# Altium PCB ZYNQ-HS-DEV-PCB.PcbDoc (part 9 of 13)
Units mm, origin at the board's own origin, x right, y up, seen from the top; angles counter-clockwise.
Board outline 125.73 x 111.93 mm, 10 copper layers (S1 (SIG), S2 (GND), S3 (SIG), S4 (GND), S5 (PWR), S6 (SIG), S7 (GND), S8 (SIG), S9 (GND), S10 (SIG)), stack 1.597 mm thick; 545 components, 400 nets, 2449 pads, 1577 vias.
Unrouted connection lines stored in the file: 309.
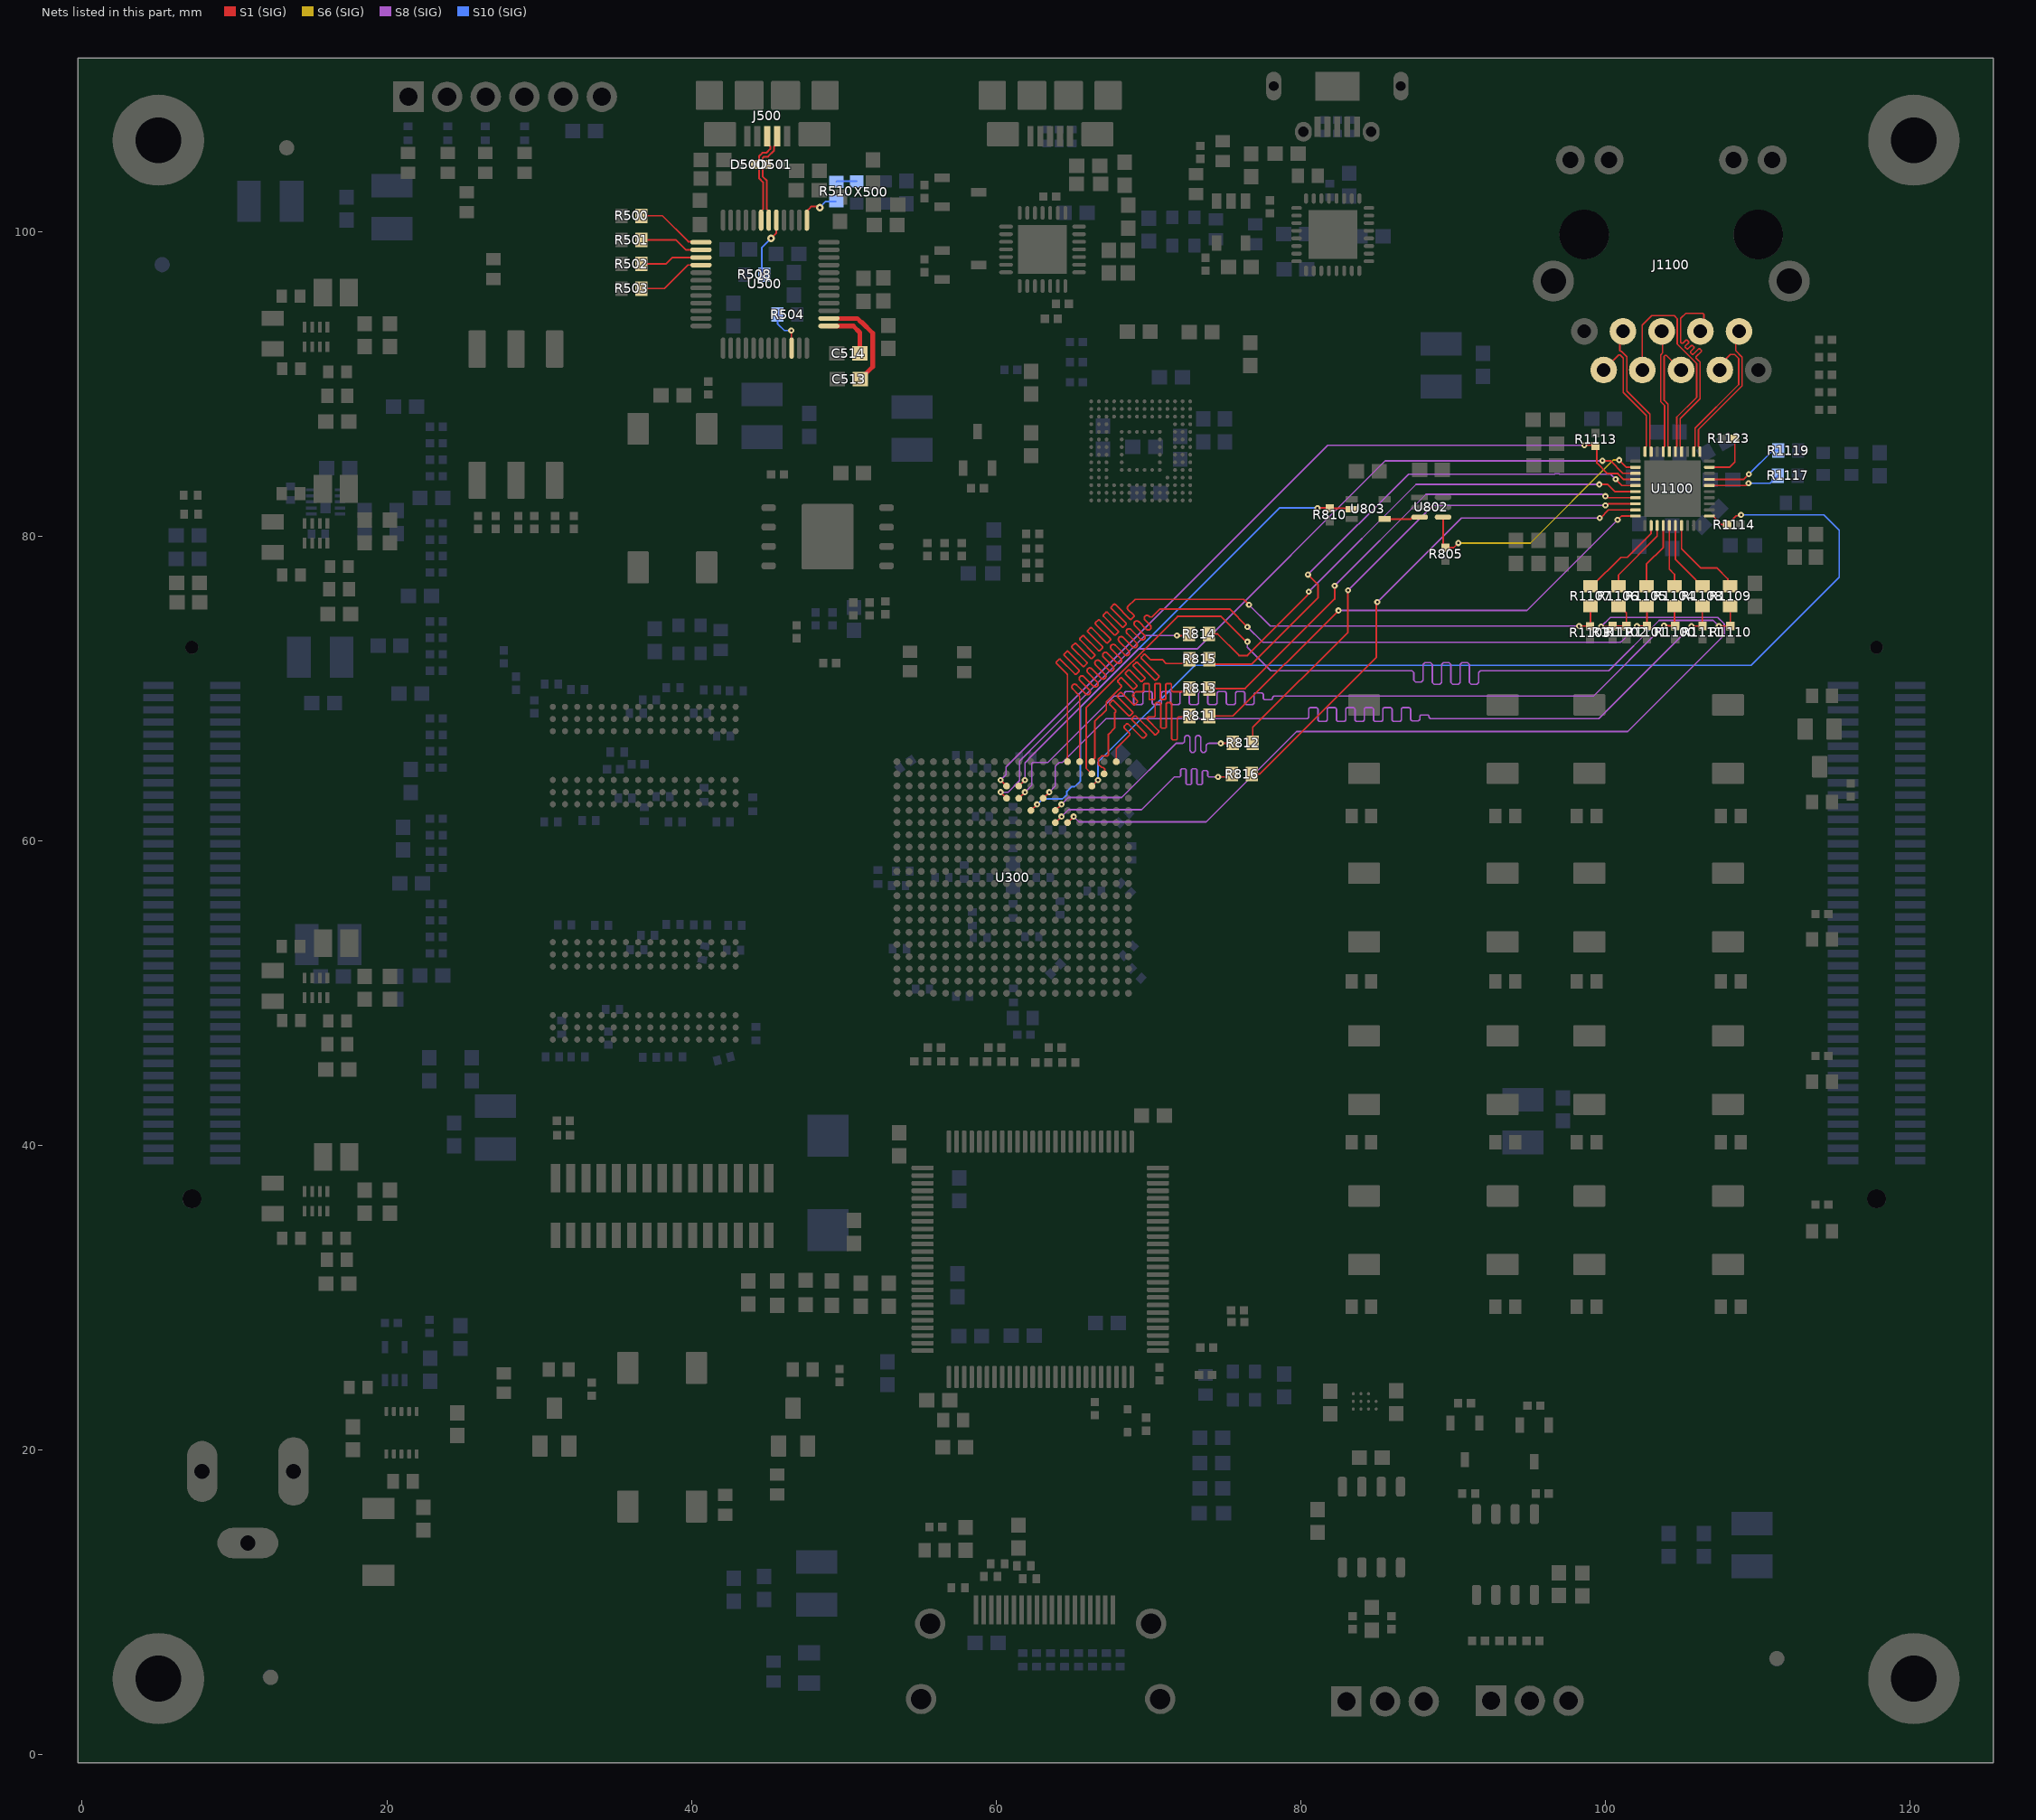
[diagram p16: the nets of this part, all layers, seen from the top]

## Via types
v1: diameter 0.4, hole 0.15, S1 (SIG) to S10 (SIG), tented both sides, 892 vias
v2: diameter 0.5, hole 0.2, S1 (SIG) to S10 (SIG), tented both sides, 231 vias
v3: diameter 0.6, hole 0.3, S1 (SIG) to S10 (SIG), tented both sides, 188 vias
v4: diameter 1, hole 0.5, S1 (SIG) to S10 (SIG), tented both sides, 158 vias
v5: diameter 0.5, hole 0.25, S1 (SIG) to S10 (SIG), tented both sides, 108 vias

## Nets (pads, with @x,y where several pads share a name; then routed paths per layer and width w, separated by ;. In a path a pad name is that pad's centre, name@x,y a point inside that pad or via, vN(x,y) a via of type N, cw(c..) or ccw(c..) an arc to the next point about the centre after c; other vN are vias at no path point) (continued)
ETH_MDC: U300.C11 U1100.13 | length 50.3
  S1 (SIG) w0.11: U300.C11@61.488,63.595 v1(61.888,63.995) ; v1(99.8,84.95) 100.328,84.95 101.153,84.125 U1100.13@101.975,84.125
  S8 (SIG) w0.1: v1(61.888,63.995) 61.888,65.108 62.138,65.358 62.138,65.388 69.35,72.6 73.205,72.6 85.555,84.95 v1(99.8,84.95)
ETH_MDI0_N: J1100.3 U1100.2 | length 9.3
  S1 (SIG) w0.1: U1100.2@105.8,85.55 105.8,85.805 105.887,85.892 105.887,87.093 108.753,89.959 108.753,91.66 108.479,91.933 108.193,91.933 107.505,91.245 J1100.3@107.505,90.91
ETH_MDI0_P: J1100.2 U1100.1 | length 9.4
  S1 (SIG) w0.1: U1100.1@106.2,85.55 106.2,85.805 106.114,85.892 106.114,86.999 108.98,89.865 108.98,91.754 108.55,92.183 108.55,93.225 J1100.2@108.775,93.45
ETH_MDI1_N: J1100.7 U1100.5 | length 15.4
  S1 (SIG) w0.1: J1100.7@102.425,90.91 102.425,93.85 103.05,94.475 104.525,94.475 104.72,94.28 104.72,92.605 105.99,91.335 105.99,89.122 104.687,87.818 104.687,85.892 104.6,85.805 U1100.5@104.6,85.55
ETH_MDI1_P: J1100.4 U1100.4 | length 15.2
  S1 (SIG) w0.1: U1100.4@105,85.55 105,85.805 104.914,85.892 104.914,87.724 106.217,89.028 106.217,91.429 106.165,91.48 106.13,91.516 105.953,91.692 105.953,91.775 106.305,92.127 106.305,92.197 106.199,92.303 106.128,92.303 105.77,91.946 105.7,91.946 105.594,92.052 105.594,92.123 105.818,92.347 105.818,92.418 105.712,92.524 105.641,92.524 105.417,92.299 105.346,92.299 105.24,92.405 105.24,92.476 105.464,92.7 105.464,92.771 105.358,92.877 105.288,92.877 105.088,92.678 105.006,92.678 104.947,92.737 104.947,93.284 104.947,94.297 105.285,94.635 106.407,94.635 106.465,94.576 106.465,93.68 J1100.4@106.235,93.45
ETH_MDI2_N: J1100.6 U1100.7 | length 8.1
  S1 (SIG) w0.1: J1100.6@103.695,93.45 103.759,93.386 103.759,92.033 103.634,91.908 103.634,88.827 103.887,88.575 103.887,85.892 103.8,85.805 U1100.7@103.8,85.55
ETH_MDI2_P: J1100.5 U1100.6 | length 7.9
  S1 (SIG) w0.1: U1100.6@104.2,85.55 104.2,85.805 104.114,85.892 104.114,88.669 103.861,88.921 103.861,91.814 103.92,91.872 104.003,91.872 J1100.5@104.965,90.91
ETH_MDI3_N: J1100.9 U1100.10 | length 8.6
  S1 (SIG) w0.1: J1100.9@99.885,90.91 100.878,91.903 100.961,91.903 101.173,91.69 101.173,89.443 102.687,87.93 102.687,85.892 102.6,85.805 U1100.10@102.6,85.55
ETH_MDI3_P: J1100.8 U1100.9 | length 8.9
  S1 (SIG) w0.1: J1100.8@101.155,93.45 100.954,93.249 100.954,92.188 101.012,92.13 101.055,92.13 101.4,91.784 101.4,89.537 102.914,88.024 102.914,85.892 103,85.805 U1100.9@103,85.55
ETH_MDIO: R1113.1 U300.C10 U1100.14 | length 53.3
  S1 (SIG) w0.11: v1(60.288,63.995) U300.C10@60.688,63.595 ; v1(98.625,85.975) 99.13,85.975 99.18,85.925 R1113.1@99.18,85.805 ; R1113.1@99.35,85.925 99.205,85.78 99.37,85.78 99.445,85.705 99.445,84.803 100.143,84.105 100.822,84.105 101.202,83.725 U1100.14@101.975,83.725
  S8 (SIG) w0.1: v1(60.288,63.995) 60.644,64.351 60.644,64.846 81.773,85.975 v1(98.625,85.975)
ETH_NINT: R1114.1 U300.C17 U1100.31 | length 68
  S1 (SIG) w0.11: U300.C17@66.288,63.595 v1(66.688,63.995) ; U1100.31@106.825,81.325 107.072,81.325 107.624,80.773 107.977,80.773 R1114.1@108,80.75 108.595,81.345 108.845,81.345 v1(108.9,81.4)
  S10 (SIG) w0.11: v1(66.688,63.995) 66.688,65.175 73.038,71.525 109.575,71.525 115.35,77.3 115.35,80.4 114.346,81.404 114.342,81.4 v1(108.9,81.4)
ETH_PHY_NRST: R805.1 U802.4 U1100.12 | length 17.1
  S1 (SIG) w0.11: U802.4@89.34,81.251 89.34,79.41 R805.1@89.5,79.25 90.05,79.25 v1(90.35,79.55) ; v1(100.9,85) 101.375,84.525 U1100.12@101.975,84.525
  S6 (SIG) w0.1: v1(90.35,79.55) 95.075,79.55 100.525,85 v1(100.9,85)
ETH_PHY_RX_CLK: R1109.1 U1100.27 | length 6
  S1 (SIG) w0.11: U1100.27@105,80.7 105,79.164 106.241,77.924 107.315,77.924 108.038,77.201 108.038,76.862 R1109.1@108.2,76.7
ETH_PHY_RX_CTL: R1108.1 U1100.26 | length 4.8
  S1 (SIG) w0.11: U1100.26@104.6,80.7 104.6,78.465 105.945,77.12 105.945,77.045 106.29,76.7 R1108.1@106.365,76.7
ETH_PHY_RXD0: R1104.1 U1100.25 | length 4.1
  S1 (SIG) w0.11: U1100.25@104.2,80.7 104.2,77.83 104.53,77.5 R1104.1@104.53,76.7
ETH_PHY_RXD1: R1105.1 U1100.24 | length 4.5
  S1 (SIG) w0.11: R1105.1@102.695,76.7 102.695,78.173 103.8,79.278 U1100.24@103.8,80.7
ETH_PHY_RXD2: R1106.1 U1100.23 | length 5.1
  S1 (SIG) w0.11: R1106.1@100.86,76.7 100.86,77.455 103.4,79.995 U1100.23@103.4,80.7
ETH_PHY_RXD3: R1107.1 U1100.22 | length 5.9
  S1 (SIG) w0.11: R1107.1@99.025,76.7 99.1,76.7 101.015,78.615 101.43,78.615 103,80.185 U1100.22@103,80.7
ETH_PS_NRST: R810.2 U300.E12 U803.2 | length 32.3
  S1 (SIG) w0.11: U300.E12@62.288,61.995 v1(62.688,62.395) ; v1(81.1,81.85) 81.875,81.85 R810.2@81.9,81.825 83.301,81.825 U803.2@83.35,81.776
  S10 (SIG) w0.11: v1(62.688,62.395) 63.043,62.75 64.345,62.75 64.643,63.048 64.643,63.252 64.941,63.55 65.145,63.55 65.533,63.938 65.533,68.783 78.6,81.85 v1(81.1,81.85)
ETH_PS_SCTRO: U802.3 U803.4 | length 2.4
  S1 (SIG) w0.11: U803.4@85.5,81.126 87.235,81.126 87.36,81.251 U802.3@87.8,81.251
ETH_PS_TX_CLK: R811.2 U300.A19 | length 20.6
  S1 (SIG) w0.11: U300.A19@67.888,65.195 67.888,66.063 68.738,66.912 68.776,66.951 68.776,67.054 68.406,67.425 68.406,67.527 68.561,67.682 68.664,67.682 69.594,66.751 69.697,66.751 69.851,66.906 69.851,67.009 68.921,67.939 68.921,68.042 69.075,68.197 69.178,68.197 70.397,66.978 70.5,66.978 70.654,67.133 70.654,67.235 69.926,67.964 69.926,68.067 69.999,68.139 70.312,68.139 70.367,68.139 70.44,68.212 70.44,69.01 70.513,69.083 70.731,69.083 70.804,69.01 70.804,67.47 70.877,67.397 71.095,67.397 71.168,67.47 71.168,69.01 71.241,69.083 71.459,69.083 71.532,69.01 71.532,66.699 71.605,66.626 71.823,66.626 71.896,66.699 71.896,68.067 71.969,68.139 72.3,68.139 72.639,68.139 R811.2@72.7,68.2
ETH_PS_TX_CTL: R816.2 U300.F14 | length 17.3
  S1 (SIG) w0.11: U300.F14@63.888,61.195 v1(64.288,61.595) ; v1(74.575,64.195) 75.295,64.195 R816.2@75.475,64.375
  S8 (SIG) w0.1: v1(64.288,61.595) 64.738,62.045 69.545,62.045 71.7,64.2 72,64.2 72.05,64.2 72.121,64.271 72.121,64.65 72.192,64.721 72.404,64.721 72.475,64.65 72.475,63.769 72.546,63.699 72.758,63.699 72.829,63.769 72.829,64.65 72.9,64.721 73.112,64.721 73.183,64.65 73.183,63.769 73.254,63.699 73.466,63.699 73.537,63.769 73.537,64.533 73.608,64.604 73.82,64.604 73.891,64.533 73.891,64.271 73.962,64.2 74.082,64.2 74.57,64.2 v1(74.575,64.195)
ETH_PS_TXD0: R812.2 U300.E14 | length 17.2
  S1 (SIG) w0.11: U300.E14@63.888,61.995 v1(64.288,62.395) ; v1(74.75,66.4) 75.525,66.4 R812.2@75.55,66.425
  S8 (SIG) w0.1: v1(64.288,62.395) 64.738,62.845 68.245,62.845 71.8,66.4 72.15,66.4 72.2,66.4 ccw(c72.2,66.577) 72.377,66.577 72.377,66.742 cw(c72.554,66.742) 72.731,66.742 72.731,65.975 ccw(c72.908,65.975) 73.085,65.975 73.085,66.742 cw(c73.262,66.742) 73.439,66.742 73.439,65.975 ccw(c73.616,65.975) 73.793,65.975 73.793,66.223 cw(c73.97,66.223) 73.97,66.4 74.35,66.4 v1(74.75,66.4)
ETH_PS_TXD1: R813.2 U300.B18 | length 20.5
  S1 (SIG) w0.11: U300.B18@67.088,64.395 67.131,64.438 67.131,64.72 67.036,64.815 66.93,64.815 66.708,65.037 66.708,65.352 66.93,65.575 67.311,65.575 67.375,65.639 67.375,66.7 67.375,66.99 67.78,67.395 67.78,68.395 67.819,68.434 ccw(c67.741,68.512) 67.819,68.589 67.467,68.942 cw(c67.518,68.993) 67.467,69.045 67.621,69.199 cw(c67.673,69.148) 67.724,69.199 68.701,68.222 ccw(c68.752,68.274) 68.804,68.222 68.958,68.377 ccw(c68.907,68.428) 68.958,68.48 67.981,69.456 cw(c68.033,69.508) 67.981,69.559 68.136,69.714 cw(c68.187,69.662) 68.239,69.714 69.008,68.945 ccw(c69.059,68.996) 69.111,68.945 69.265,69.099 ccw(c69.214,69.151) 69.265,69.202 69.004,69.463 cw(c69.082,69.541) 69.004,69.619 69.18,69.795 69.352,69.795 69.525,69.795 69.58,69.795 ccw(c69.58,69.905) 69.69,69.905 69.69,70.248 cw(c69.763,70.248) 69.763,70.32 69.981,70.32 cw(c69.981,70.248) 70.054,70.248 70.054,69.343 ccw(c70.127,69.343) 70.127,69.27 70.345,69.27 ccw(c70.345,69.343) 70.418,69.343 70.418,70.248 cw(c70.491,70.248) 70.491,70.32 70.709,70.32 cw(c70.709,70.248) 70.782,70.248 70.782,69.359 ccw(c70.855,69.359) 70.855,69.287 71.073,69.287 ccw(c71.073,69.359) 71.146,69.359 71.146,70.248 cw(c71.219,70.248) 71.219,70.32 71.437,70.32 cw(c71.437,70.248) 71.51,70.248 71.51,69.905 ccw(c71.62,69.905) 71.62,69.795 71.825,69.795 72.495,69.795 R813.2@72.7,70
ETH_PS_TXD2: R814.2 U300.D10 | length 18
  S1 (SIG) w0.11: v1(60.288,63.195) U300.D10@60.688,62.795 ; v1(71.875,73.475) 72.611,73.475 72.675,73.539 R814.2@72.675,73.575
  S8 (SIG) w0.1: v1(60.288,63.195) 60.783,63.195 61.538,63.95 61.538,65.238 63,66.7 69.775,73.475 v1(71.875,73.475)
ETH_PS_TXD3: R815.2 U300.A17 | length 19.7
  S1 (SIG) w0.11: U300.A17@66.288,65.195 66.288,65.239 66.478,65.429 66.478,66.7 66.478,67.832 67.235,68.59 67.235,69.11 68.07,69.945 68.092,69.945 68.156,70.01 68.156,70.031 68.195,70.07 ccw(c68.117,70.148) 68.195,70.226 67.998,70.423 cw(c68.049,70.474) 67.998,70.526 68.152,70.68 cw(c68.204,70.629) 68.255,70.68 68.96,69.975 ccw(c69.012,70.027) 69.063,69.975 69.218,70.13 ccw(c69.166,70.181) 69.218,70.233 68.513,70.938 cw(c68.564,70.989) 68.513,71.041 68.667,71.195 cw(c68.719,71.144) 68.77,71.195 69.489,70.477 ccw(c69.54,70.528) 69.592,70.477 69.746,70.631 ccw(c69.695,70.682) 69.746,70.734 69.028,71.453 cw(c69.079,71.504) 69.028,71.555 69.182,71.71 cw(c69.233,71.658) 69.285,71.71 70.413,70.582 ccw(c70.464,70.633) 70.516,70.582 70.67,70.736 ccw(c70.619,70.788) 70.67,70.839 69.542,71.967 cw(c69.594,72.019) 69.542,72.07 69.697,72.225 cw(c69.748,72.173) 69.8,72.225 70.092,71.932 ccw(c70.17,72.01) 70.17,71.9 70.905,71.9 71.165,71.64 72.415,71.64 R815.2@72.7,71.925
ETH_RSET: R1123.2 U1100.39 | length 3.3
  S1 (SIG) w0.11: U1100.39@106.825,84.525 108.148,84.525 108.5,84.877 R1123.2@108.5,86.4
ETH_RX_CLK: R1109.2 R1110.2 U300.B17 | length 62.7
  S1 (SIG) w0.11: U300.B17@66.288,64.395 65.908,64.775 65.908,68.733 71.91,74.735 74.763,74.735 76.423,73.075 v1(76.5,73.075) ; v1(107.45,74.1) R1110.2@108.2,74.1 R1109.2@108.2,75.4
  S8 (SIG) w0.1: v1(76.5,73.075) 76.5,72.7 78.025,71.175 80.125,71.175 87.301,71.175 87.422,71.053 87.422,70.547 87.544,70.425 87.909,70.425 88.03,70.547 88.03,71.577 88.152,71.699 88.517,71.699 88.638,71.577 88.638,70.4 88.76,70.278 89.125,70.278 89.246,70.4 89.246,71.577 89.368,71.699 89.733,71.699 89.854,71.577 89.854,70.4 89.976,70.278 90.341,70.278 90.462,70.4 90.462,71.577 90.584,71.699 90.949,71.699 91.07,71.577 91.07,70.4 91.192,70.278 91.557,70.278 91.678,70.4 91.678,71.053 91.8,71.175 91.85,71.175 100.225,71.175 103.525,74.475 107.075,74.475 v1(107.45,74.1)
ETH_RX_CTL: R1108.2 R1111.2 U300.D13 | length 59.8
  S1 (SIG) w0.11: U300.D13@63.088,62.795 v1(63.488,63.195) ; v1(105.65,74.1) R1111.2@106.375,74.1 106.365,74.11 R1108.2@106.365,75.4
  S8 (SIG) w0.1: v1(63.488,63.195) 63.888,63.595 63.888,64.89 64.143,65.145 64.345,65.145 67.225,68.025 80.35,68.025 80.4,68.025 ccw(c80.4,68.147) 80.522,68.147 80.522,68.625 cw(c80.643,68.625) 80.643,68.746 81.008,68.746 cw(c81.008,68.625) 81.13,68.625 81.13,67.965 ccw(c81.251,67.965) 81.251,67.844 81.616,67.844 ccw(c81.616,67.965) 81.738,67.965 81.738,68.625 cw(c81.859,68.625) 81.859,68.746 82.224,68.746 cw(c82.224,68.625) 82.346,68.625 82.346,67.965 ccw(c82.467,67.965) 82.467,67.844 82.832,67.844 ccw(c82.832,67.965) 82.954,67.965 82.954,68.625 cw(c83.075,68.625) 83.075,68.746 83.44,68.746 cw(c83.44,68.625) 83.562,68.625 83.562,67.965 ccw(c83.683,67.965) 83.683,67.844 84.048,67.844 ccw(c84.048,67.965) 84.17,67.965 84.17,68.625 cw(c84.291,68.625) 84.291,68.746 84.656,68.746 cw(c84.656,68.625) 84.778,68.625 84.778,67.965 ccw(c84.899,67.965) 84.899,67.844 85.264,67.844 ccw(c85.264,67.965) 85.386,67.965 85.386,68.625 cw(c85.507,68.625) 85.507,68.746 85.872,68.746 cw(c85.872,68.625) 85.994,68.625 85.994,67.965 ccw(c86.115,67.965) 86.115,67.844 86.48,67.844 ccw(c86.48,67.965) 86.602,67.965 86.602,68.625 cw(c86.723,68.625) 86.723,68.746 87.088,68.746 cw(c87.088,68.625) 87.21,68.625 87.21,68.003 ccw(c87.331,68.003) 87.331,67.881 87.696,67.881 ccw(c87.696,68.003) 87.818,68.003 87.818,68.147 cw(c87.939,68.147) 87.939,68.268 88.304,68.268 cw(c88.304,68.147) 88.426,68.147 ccw(c88.547,68.147) 88.547,68.025 90.625,68.025 99.575,68.025 v1(105.65,74.1)
ETH_RXD0: R1100.1 R1104.2 U300.D11 | length 60.9
  S1 (SIG) w0.11: U300.D11@61.488,62.795 v1(61.888,63.195) ; v1(103.85,74.125) 104.55,74.125 R1100.1@104.575,74.1 104.53,74.145 R1104.2@104.53,75.4
  S8 (SIG) w0.1: v1(61.888,63.195) 62.338,63.645 62.338,65.086 62.396,65.145 63.395,65.145 67.754,69.504 68.25,69.504 68.3,69.504 ccw(c68.3,69.625) 68.422,69.625 68.422,69.676 cw(c68.543,69.676) 68.543,69.798 68.908,69.798 cw(c68.908,69.676) 69.03,69.676 69.03,69.072 ccw(c69.151,69.072) 69.151,68.951 69.516,68.951 ccw(c69.516,69.072) 69.638,69.072 69.638,69.676 cw(c69.759,69.676) 69.759,69.798 70.124,69.798 cw(c70.124,69.676) 70.246,69.676 70.246,69.072 ccw(c70.367,69.072) 70.367,68.951 70.732,68.951 ccw(c70.732,69.072) 70.854,69.072 70.854,69.676 cw(c70.975,69.676) 70.975,69.798 71.34,69.798 cw(c71.34,69.676) 71.462,69.676 71.462,69.072 ccw(c71.583,69.072) 71.583,68.951 71.948,68.951 ccw(c71.948,69.072) 72.07,69.072 72.07,69.676 cw(c72.191,69.676) 72.191,69.798 72.556,69.798 cw(c72.556,69.676) 72.678,69.676 72.678,69.072 ccw(c72.799,69.072) 72.799,68.951 73.164,68.951 ccw(c73.164,69.072) 73.286,69.072 73.286,69.676 cw(c73.407,69.676) 73.407,69.798 73.772,69.798 cw(c73.772,69.676) 73.894,69.676 73.894,69.072 ccw(c74.015,69.072) 74.015,68.951 74.38,68.951 ccw(c74.38,69.072) 74.502,69.072 74.502,69.676 cw(c74.623,69.676) 74.623,69.798 74.988,69.798 cw(c74.988,69.676) 75.11,69.676 75.11,69.072 ccw(c75.231,69.072) 75.231,68.951 75.596,68.951 ccw(c75.596,69.072) 75.718,69.072 75.718,69.676 cw(c75.839,69.676) 75.839,69.798 76.204,69.798 cw(c76.204,69.676) 76.326,69.676 76.326,69.072 ccw(c76.447,69.072) 76.447,68.951 76.812,68.951 ccw(c76.812,69.072) 76.934,69.072 76.934,69.586 cw(c77.055,69.586) 77.055,69.708 77.42,69.708 cw(c77.42,69.586) 77.542,69.586 77.542,69.382 ccw(c77.663,69.382) 77.663,69.26 78.028,69.26 ccw(c78.028,69.382) 78.15,69.382 cw(c78.271,69.382) 78.271,69.504 85.15,69.504 99.229,69.504 v1(103.85,74.125)
ETH_RXD1: R1101.1 R1105.2 U300.A16 | length 66.6
  S1 (SIG) w0.11: U300.A16@65.488,65.195 65.488,69.308 65.488,69.385 ccw(c65.177,69.385) 65.397,69.605 65.026,69.975 cw(c65.155,70.104) 65.026,70.233 cw(c65.155,70.104) 65.284,70.233 65.872,69.644 ccw(c66.001,69.773) 66.13,69.644 ccw(c66.001,69.773) 66.13,69.902 65.506,70.525 cw(c65.635,70.654) 65.506,70.783 cw(c65.635,70.654) 65.763,70.783 66.387,70.159 ccw(c66.516,70.288) 66.644,70.159 ccw(c66.516,70.288) 66.644,70.416 66.021,71.04 cw(c66.15,71.169) 66.021,71.297 cw(c66.15,71.169) 66.278,71.297 66.902,70.674 ccw(c67.03,70.802) 67.159,70.674 ccw(c67.03,70.802) 67.159,70.931 66.536,71.555 cw(c66.664,71.683) 66.536,71.812 cw(c66.664,71.683) 66.793,71.812 67.417,71.189 ccw(c67.545,71.317) 67.674,71.189 ccw(c67.545,71.317) 67.674,71.446 67.05,72.069 cw(c67.179,72.198) 67.05,72.327 cw(c67.179,72.198) 67.308,72.327 67.931,71.703 ccw(c68.06,71.832) 68.189,71.703 ccw(c68.06,71.832) 68.189,71.961 67.565,72.584 cw(c67.694,72.713) 67.565,72.842 cw(c67.694,72.713) 67.823,72.842 68.446,72.218 ccw(c68.575,72.347) 68.703,72.218 ccw(c68.575,72.347) 68.703,72.476 68.08,73.099 cw(c68.209,73.228) 68.08,73.356 cw(c68.209,73.228) 68.337,73.356 68.961,72.733 ccw(c69.09,72.862) 69.218,72.733 ccw(c69.09,72.862) 69.218,72.99 68.595,73.614 cw(c68.723,73.743) 68.595,73.871 cw(c68.723,73.743) 68.852,73.871 69.476,73.248 ccw(c69.604,73.376) 69.733,73.248 ccw(c69.604,73.376) 69.733,73.505 69.109,74.129 cw(c69.238,74.257) 69.109,74.386 cw(c69.238,74.257) 69.367,74.386 69.86,73.893 ccw(c69.989,74.022) 70.117,73.893 ccw(c69.989,74.022) 70.117,74.15 69.78,74.487 cw(c69.909,74.616) 69.78,74.745 cw(c69.909,74.616) 70.038,74.745 ccw(c70.166,74.874) 70.295,74.745 70.775,75.225 70.998,75.225 75.325,75.225 v1(76.5,74.05) ; v1(102.075,74.1) R1101.1@102.725,74.1 102.725,75.37 R1105.2@102.695,75.4
  S8 (SIG) w0.1: v1(76.5,74.05) 77.518,73.032 100.941,73.032 100.959,73.05 101.025,73.05 v1(102.075,74.1)
ETH_RXD2: R1102.1 R1106.2 R1112.2 U300.F15 | length 61
  S1 (SIG) w0.11: U300.F15@64.688,61.195 v1(65.088,61.595) ; v1(99.725,74.075) 100.45,74.075 R1112.2@100.475,74.1 R1102.1@101.375,74.1 101.375,74.96 100.935,75.4 R1106.2@100.86,75.4
  S8 (SIG) w0.1: v1(65.088,61.595) 65.438,61.245 70.175,61.245 73.795,61.245 79.725,67.175 101.47,67.175 107.8,73.505 107.8,74.245 107.37,74.675 100.325,74.675 v1(99.725,74.075)
ETH_RXD3: R1103.1 R1107.2 U300.A15 | length 67.5
  S1 (SIG) w0.11: U300.A15@64.688,65.195 64.688,70.8 64.688,70.878 ccw(c64.563,70.878) 64.651,70.965 63.964,71.653 cw(c64.015,71.704) 63.964,71.756 64.118,71.91 cw(c64.17,71.859) 64.221,71.91 65.174,70.957 ccw(c65.226,71.009) 65.277,70.957 65.432,71.112 ccw(c65.38,71.163) 65.432,71.215 64.479,72.168 cw(c64.53,72.219) 64.479,72.271 64.633,72.425 cw(c64.684,72.374) 64.736,72.425 65.689,71.472 ccw(c65.74,71.524) 65.792,71.472 65.946,71.627 ccw(c65.895,71.678) 65.946,71.73 64.993,72.682 cw(c65.045,72.734) 64.993,72.785 65.148,72.94 cw(c65.199,72.888) 65.251,72.94 66.204,71.987 ccw(c66.255,72.038) 66.307,71.987 66.461,72.141 ccw(c66.41,72.193) 66.461,72.244 65.508,73.197 cw(c65.56,73.249) 65.508,73.3 65.663,73.455 cw(c65.714,73.403) 65.765,73.455 66.718,72.502 ccw(c66.77,72.553) 66.821,72.502 66.976,72.656 ccw(c66.924,72.708) 66.976,72.759 66.023,73.712 cw(c66.074,73.764) 66.023,73.815 66.177,73.969 cw(c66.229,73.918) 66.28,73.969 67.233,73.016 ccw(c67.285,73.068) 67.336,73.016 67.491,73.171 ccw(c67.439,73.222) 67.491,73.274 66.538,74.227 cw(c66.589,74.278) 66.538,74.33 66.692,74.484 cw(c66.744,74.433) 66.795,74.484 67.748,73.531 ccw(c67.799,73.583) 67.851,73.531 68.005,73.686 ccw(c67.954,73.737) 68.005,73.789 67.052,74.742 cw(c67.104,74.793) 67.052,74.845 67.207,74.999 cw(c67.258,74.947) 67.31,74.999 68.263,74.046 ccw(c68.314,74.097) 68.366,74.046 68.52,74.2 ccw(c68.469,74.252) 68.52,74.303 67.567,75.256 cw(c67.619,75.308) 67.567,75.359 67.722,75.514 cw(c67.773,75.462) 67.825,75.514 68.778,74.561 ccw(c68.829,74.612) 68.88,74.561 69.035,74.715 ccw(c68.983,74.767) 69.035,74.818 68.642,75.211 cw(c68.72,75.289) 68.642,75.367 69.125,75.85 69.623,75.85 76.25,75.85 v1(76.6,75.5) ; v1(98.275,74.1) 99.025,74.1 R1107.2@99.025,75.4
  S8 (SIG) w0.1: v1(76.6,75.5) 78,74.1 v1(98.275,74.1)
ETH_TX_CLK: R811.1 U1100.20 | length 33.4
  S1 (SIG) w0.11: R811.1@74,68.2 75.55,68.2 v1(82.475,75.125) ; v1@100.816,81.075 101.066,81.325 U1100.20@101.975,81.325
  S8 (SIG) w0.1: v1(82.475,75.125) 94.85,75.125 v1(100.8,81.075)
ETH_TX_CTL: R816.1 U1100.19 | length 34.4
  S1 (SIG) w0.11: R816.1@76.9,64.38 77.305,64.38 84.97,72.045 84.97,75.62 v1(85.025,75.675) ; v1(99.625,81.2) 99.677,81.2 100.202,81.725 U1100.19@101.975,81.725
  S8 (SIG) w0.1: v1(85.025,75.675) 90.55,81.2 v1(99.625,81.2)
ETH_TXD0: R812.1 U1100.18 | length 33.8
  S1 (SIG) w0.11: R812.1@76.85,66.425 76.85,67.45 83.1,73.7 v1(83.1,76.45) ; v1(100,82.025) 100.078,82.025 100.178,82.125 U1100.18@101.975,82.125
  S8 (SIG) w0.1: v1(83.1,76.45) 88.675,82.025 v1(100,82.025)
ETH_TXD1: R813.1 U1100.17 | length 33.9
  S1 (SIG) w0.11: R813.1@74,70 76.348,70 82.225,75.877 v1(82.225,76.75) ; v1(100,82.625) 100.078,82.625 100.178,82.525 U1100.17@101.975,82.525
  S8 (SIG) w0.1: v1(82.225,76.75) 88.225,82.75 99.794,82.75 99.919,82.625 v1(100,82.625)
ETH_TXD2: R814.1 U1100.16 | length 33.5
  S1 (SIG) w0.11: R814.1@73.975,73.575 74.548,73.575 75.953,72.17 76.497,72.17 80.47,76.142 80.47,76.295 v1(80.525,76.35) ; v1(99.6,83.4) 100.15,83.4 100.625,82.925 U1100.16@101.975,82.925
  S8 (SIG) w0.1: v1(80.525,76.35) 87.575,83.4 v1(99.6,83.4)
ETH_TXD3: R815.1 U1100.15 | length 35.4
  S1 (SIG) w0.11: R815.1@74,71.925 74.335,71.59 76.768,71.59 81.14,75.962 81.14,76.81 v1(80.475,77.475) ; v1@100.675,83.743 101.093,83.325 U1100.15@101.975,83.325
  S8 (SIG) w0.1: v1(80.475,77.475) 87.075,84.075 96.655,84.075 96.68,84.1 96.97,84.1 96.995,84.075 100.35,84.075 v1(100.675,83.75)
ETH_XTAL_IN: R1117.1 U1100.36 | length 4.8
  S1 (SIG) w0.11: U1100.36@106.825,83.325 109.25,83.325 v1(109.4,83.475)
  S10 (SIG) w0.11: v1(109.4,83.475) 110.825,83.475 R1117.1@111.325,83.975
ETH_XTAL_OUT: R1119.1 U1100.37 | length 5.3
  S1 (SIG) w0.11: U1100.37@106.825,83.725 109.075,83.725 v1(109.425,84.075)
  S10 (SIG) w0.11: v1(109.425,84.075) 110.975,85.625 R1119.1@111.35,85.625
FTDI_COUT: R510.1 X500.3 | length 1.4
  S10 (SIG) w0.11: R510.1@49.5,103.275 49.525,103.3 X500.3@50.85,103.3
FTDI_D_N: D501.2 J500.2 U500.6 | length 6.5
  S1 (SIG) w0.121: U500.6@45.075,100.75 45.075,101.334 44.949,101.46 44.949,103.337 44.687,103.6 44.687,104.09 44.758,104.161 44.811,104.161 45,104.35 D501.2@45,104.4 45,104.45 44.811,104.639 44.758,104.639 44.687,104.71 44.687,104.849 44.758,104.92 45.02,104.92 45.424,105.324 45.424,105.587 45.625,105.787 J500.2@45.625,106.262
FTDI_D_P: D500.2 J500.3 U500.7 | length 6.5
  S1 (SIG) w0.121: D500.2@44.125,104.4 44.125,104.35 44.314,104.161 44.368,104.161 44.438,104.09 44.438,103.497 44.701,103.235 44.701,101.46 44.575,101.334 U500.7@44.575,100.75 ; D500.2@44.125,104.45 44.314,104.639 44.368,104.639 44.438,104.71 44.438,104.952 44.655,105.168 44.917,105.168 45.176,105.427 45.176,105.587 44.975,105.787 J500.3@44.975,106.262
FTDI_OSCI: R510.2 U500.1 | length 2.8
  S1 (SIG) w0.11: U500.1@47.575,100.75 47.575,101.351 47.749,101.525 47.75,101.525 47.875,101.65 48.35,101.65 v2(48.425,101.575)
  S10 (SIG) w0.11: v2(48.425,101.575) 48.825,101.975 R510.2@49.5,101.975
FTDI_REF: R508.1 U500.5 | length 4
  S1 (SIG) w0.11: v2(45.225,99.55) 45.575,99.9 U500.5@45.575,100.75
  S10 (SIG) w0.11: R508.1@44.775,97.175 44.625,97.325 44.625,98.95 v2(45.225,99.55)
FTDI_RST: R504.2 U500.34 | length 2.8
  S1 (SIG) w0.11: v1(46.55,93.5) 46.563,93.487 46.563,92.362 U500.34@46.575,92.35
  S10 (SIG) w0.11: R504.2@45.65,94.55 45.65,93.95 46.1,93.5 v1(46.55,93.5)
FTDI_TCK: R500.1 U500.13 | length 4.6
  S1 (SIG) w0.11: R500.1@36.7,101.033 38.092,101.033 39.789,99.336 40.589,99.336 U500.13@40.625,99.3
FTDI_TDI: R501.1 U500.14 | length 4.2
  S1 (SIG) w0.11: R501.1@36.7,99.442 38.983,99.442 39.625,98.8 U500.14@40.625,98.8
FTDI_TDO: R502.1 U500.15 | length 4.1
  S1 (SIG) w0.11: R502.1@36.7,97.875 38.322,97.875 38.747,98.3 U500.15@40.625,98.3
FTDI_TMS: R503.1 U500.16 | length 4.6
  S1 (SIG) w0.11: R503.1@36.7,96.258 38.233,96.258 39.775,97.8 U500.16@40.625,97.8
FTDI_VCCA: C514.2 U500.37 | length 3.6
  S1 (SIG) w0.3: U500.37@49.025,93.8 50.625,93.8 51.05,93.375 C514.2@51.05,92
FTDI_VCORE: C513.2 U500.38 | length 6.6
  S1 (SIG) w0.3: U500.38@49.025,94.3 50.884,94.3 51.134,94.05 51.175,94.05 51.9,93.325 51.9,91.125 C513.2@51.075,90.3